# Altium PCB driverV1.1.PcbDoc (part 1 of 2)
Units mil, origin at the board's own origin, x right, y up, seen from the top; angles counter-clockwise.
Board outline 6000 x 4000 mil, 2 copper layers (Top Layer, Bottom Layer); 175 components, 117 nets, 501 pads, 586 vias.
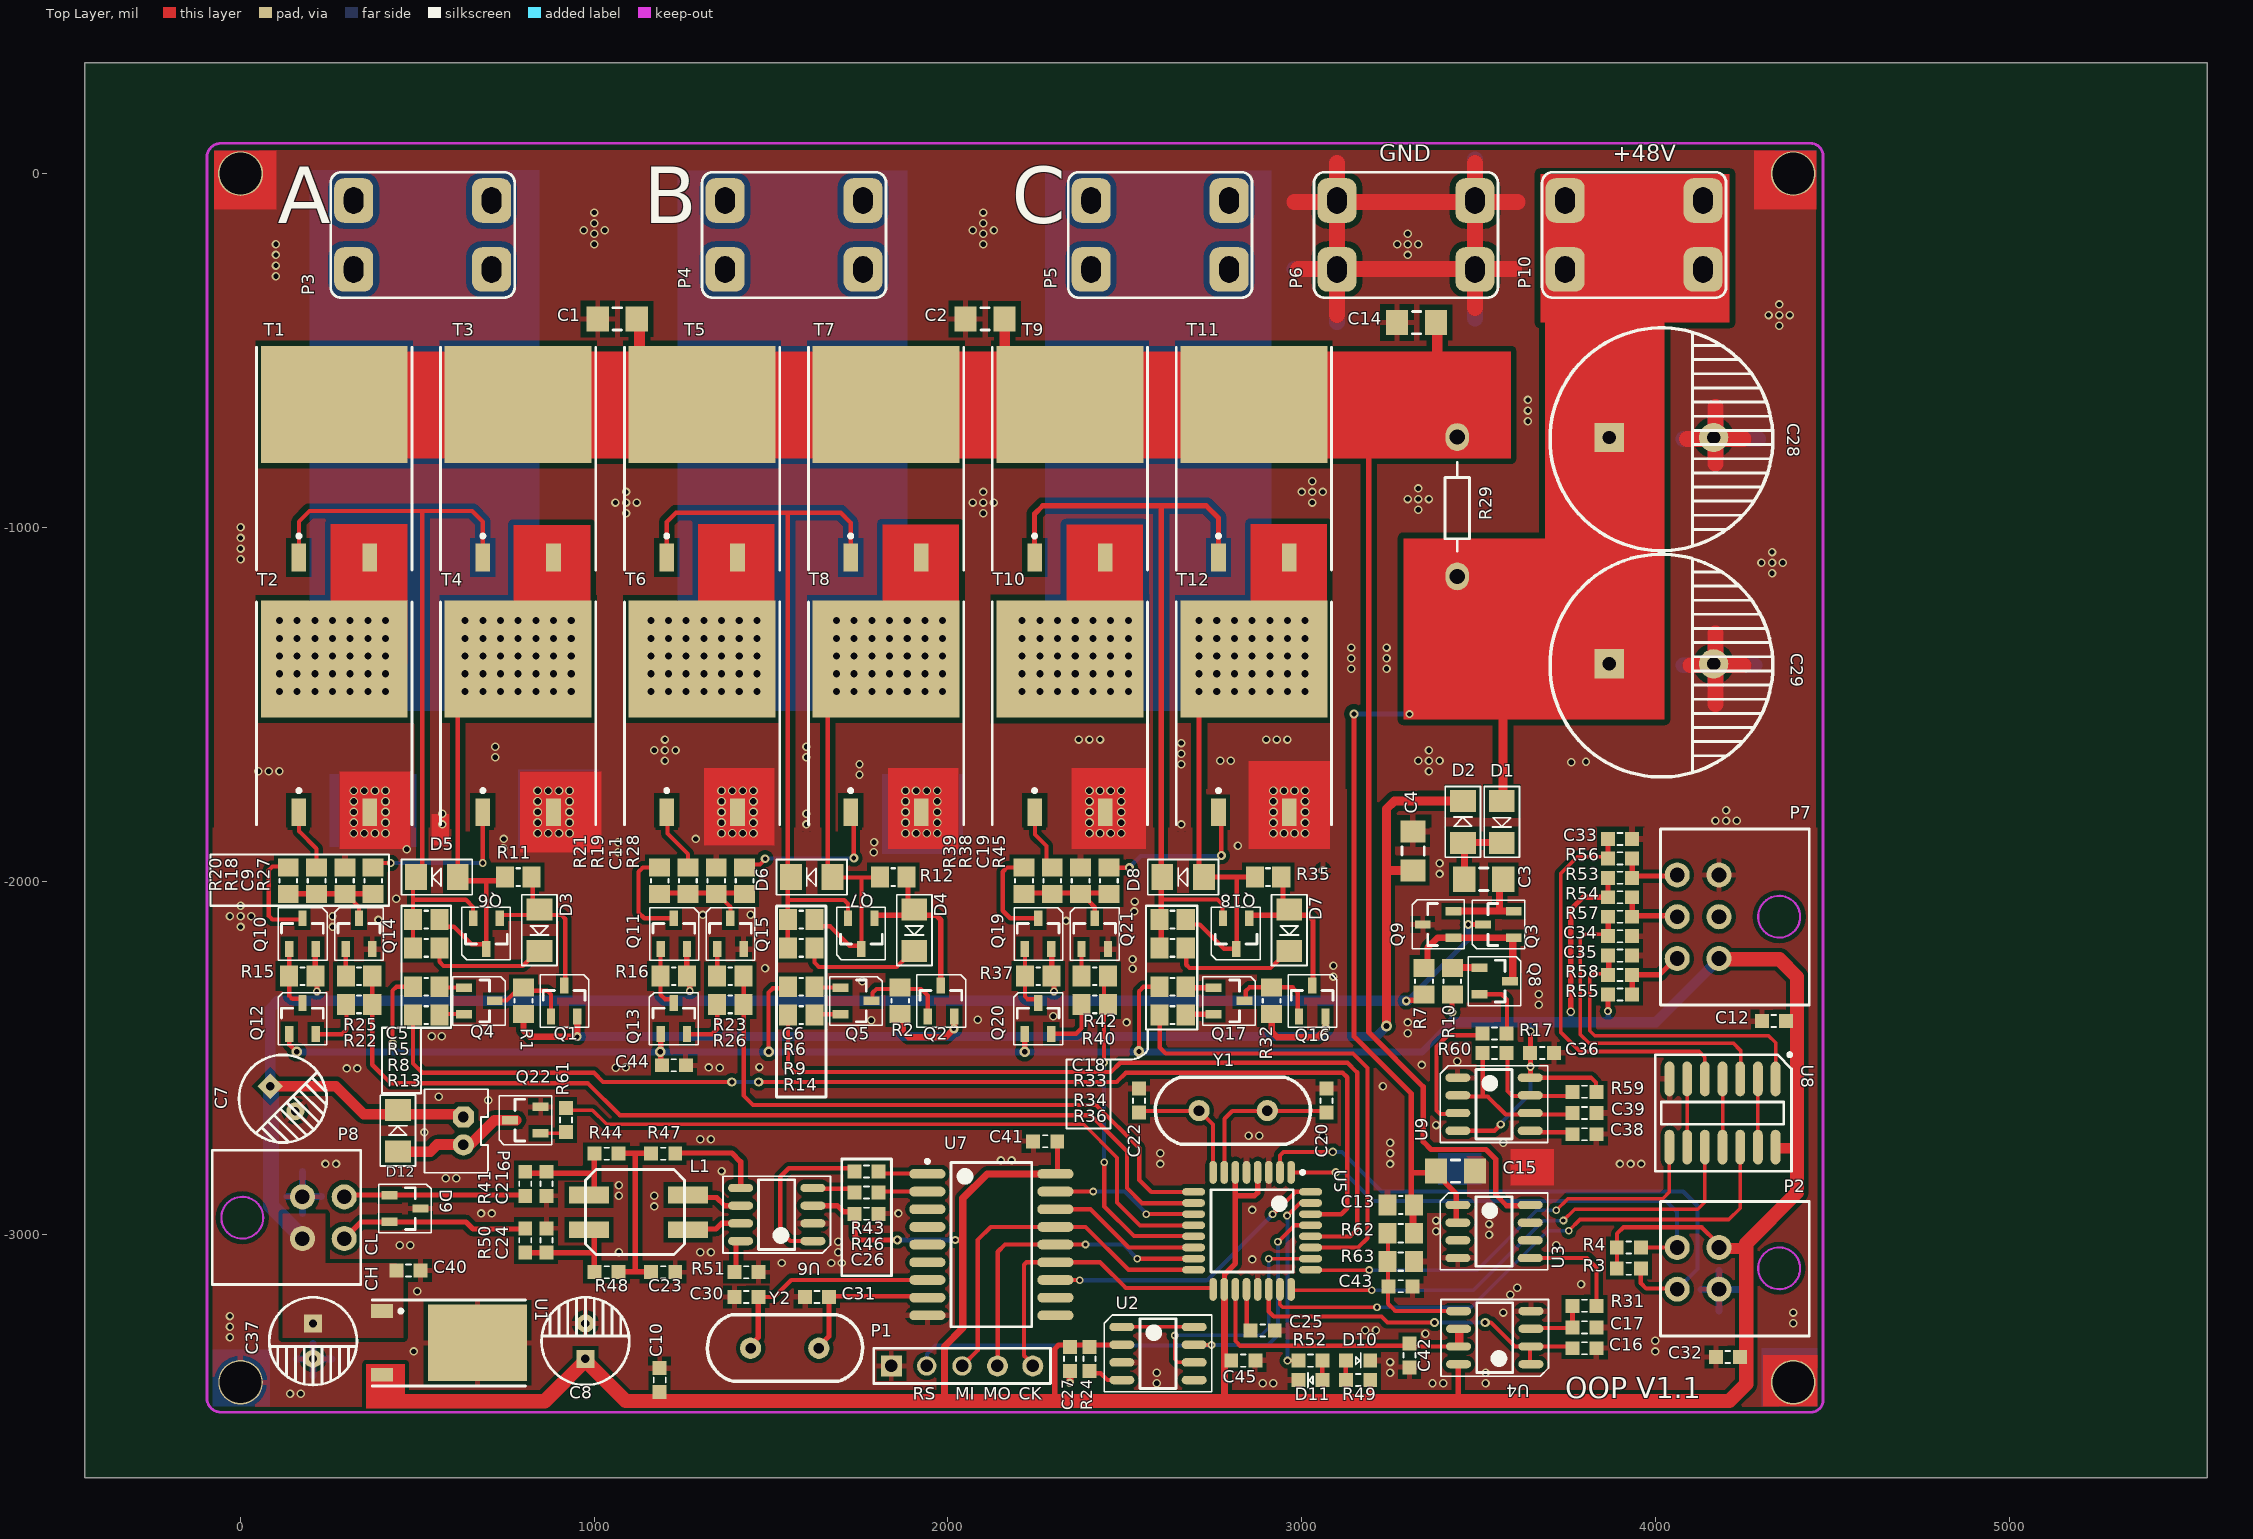
[diagram p0: Top Layer view]
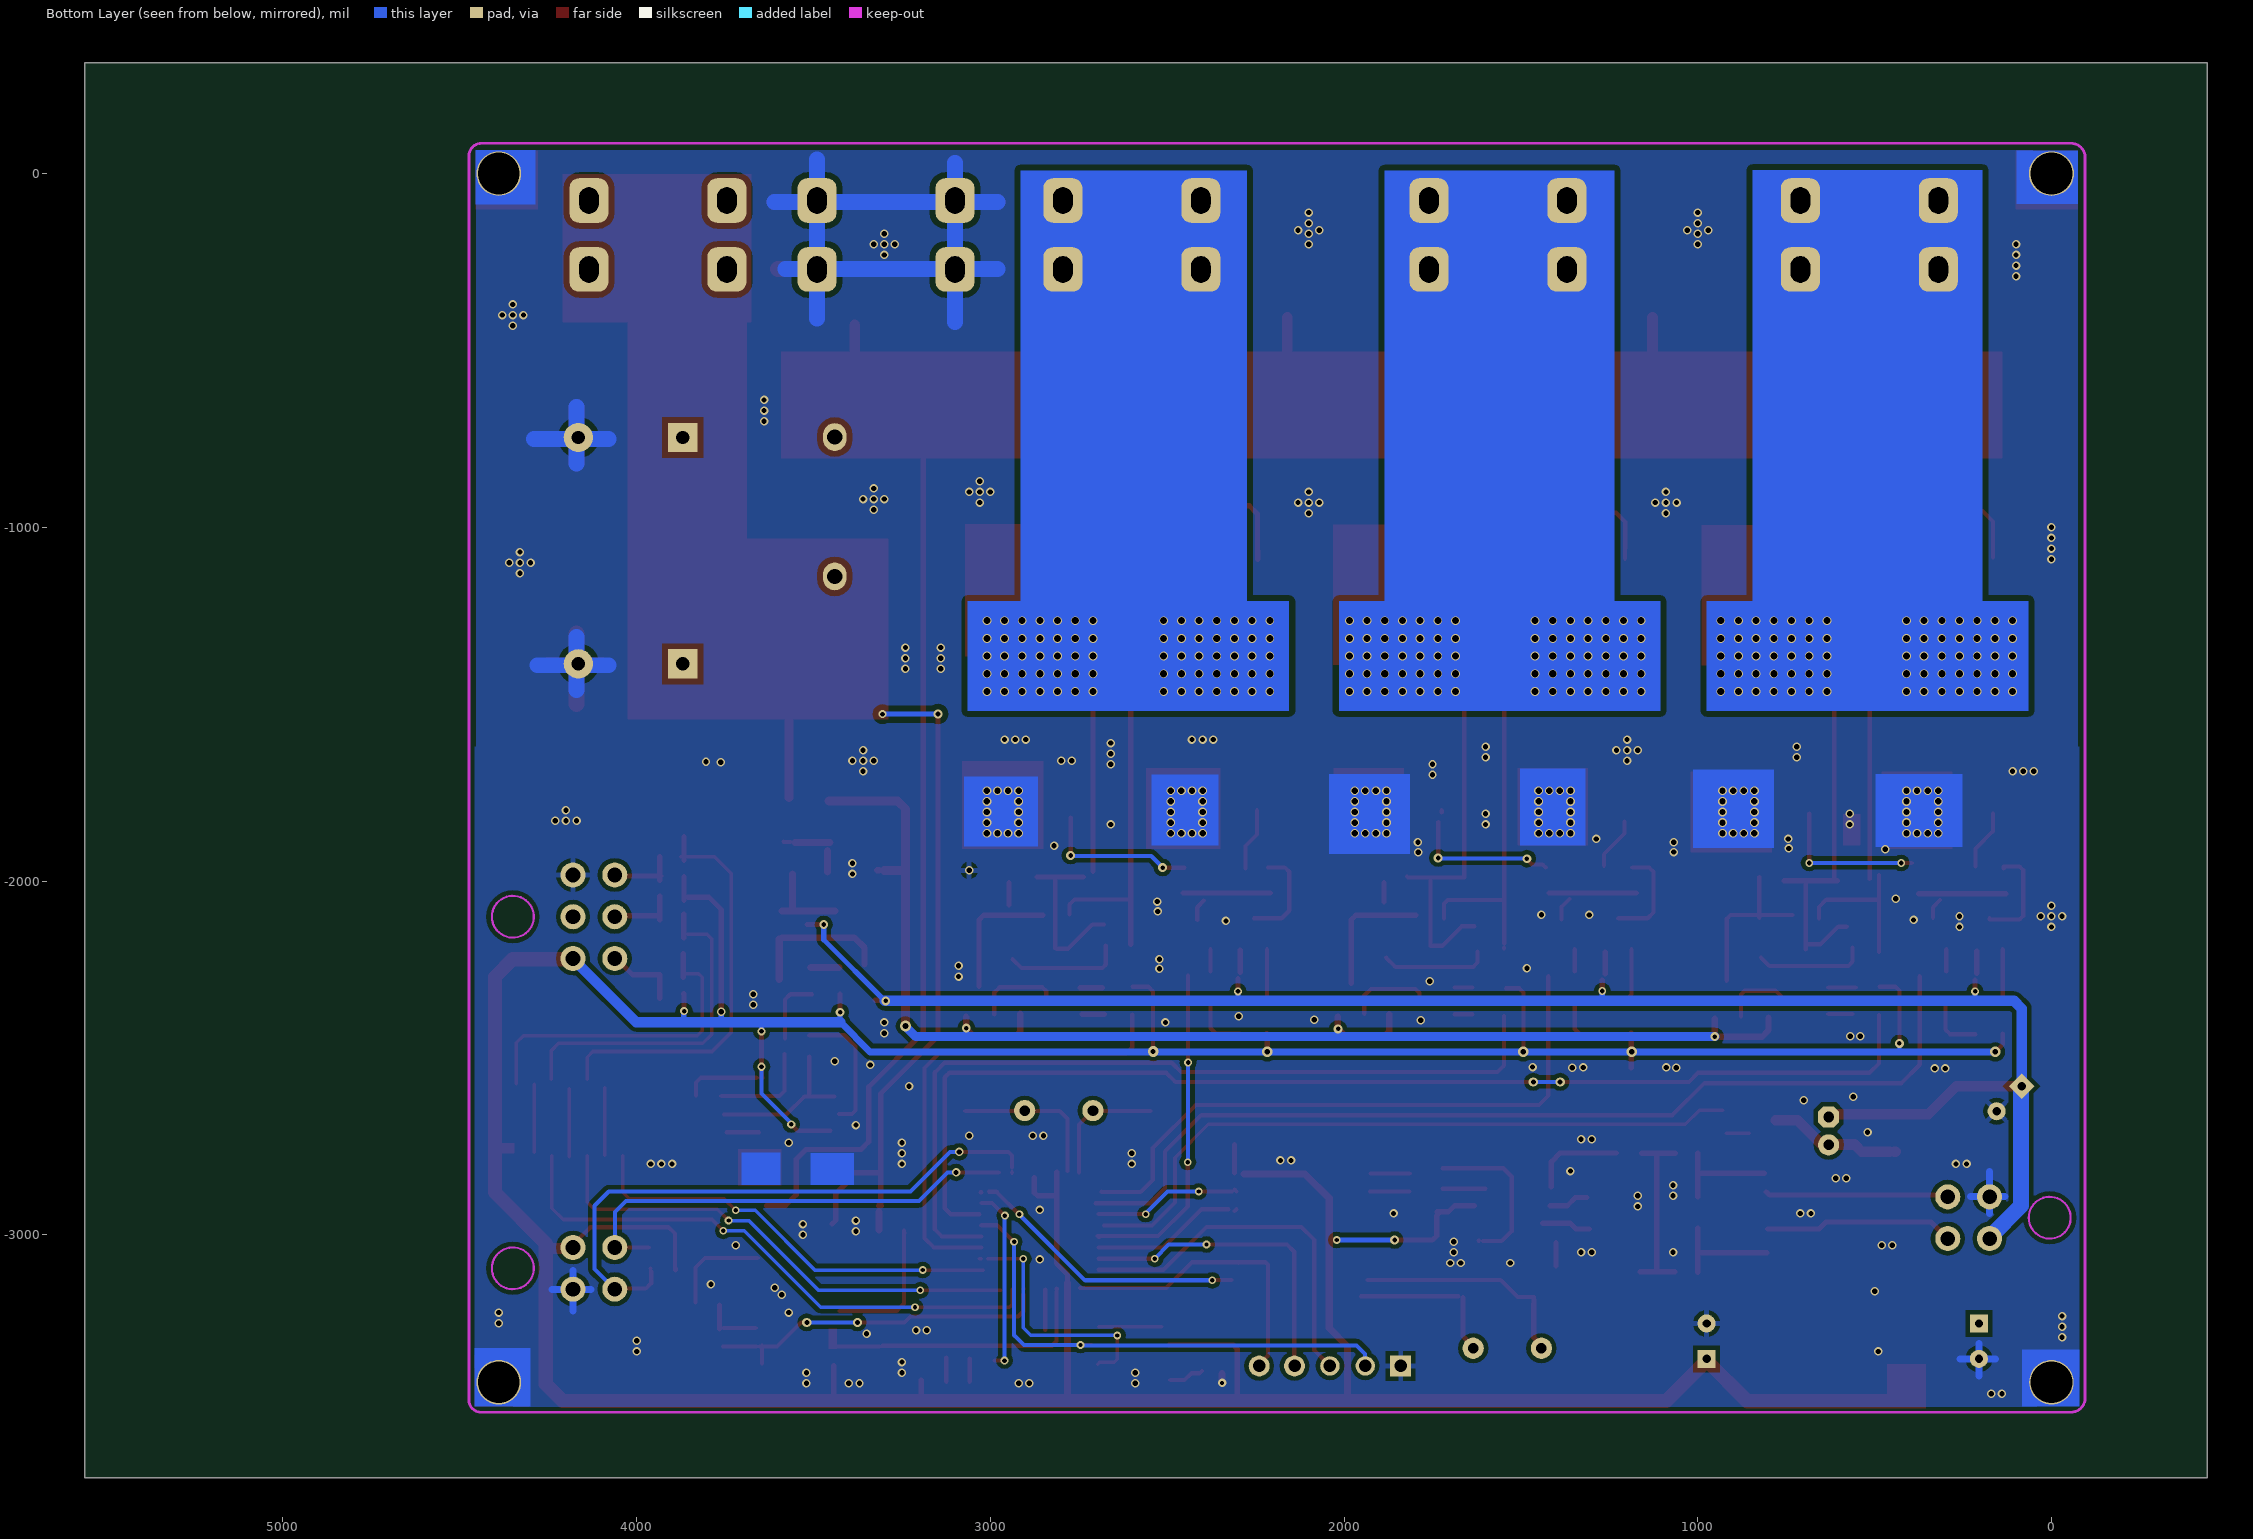
[diagram p1: Bottom Layer view, seen from below]

## Layer stack, top to bottom
Top Layer: signal copper 1.4
Dielectric: dielectric 12.6, FR-4, Dk 4.8
Bottom Layer: signal copper 1.4

## Board outline
-440,-3687 5560,-3687 5560,313 -440,313

## Design rules (kind name [scope] priority, off if disabled: settings)
Clearance [All] p1 off: gap=12
ComponentClearance [All] p1: gap=0 collisioncheckmode=3 verticalgap=0
HoleSize [All] p1: absolutevalues=TRUE maxlimit=200 minlimit=1 maxpercent=80.000 minpercent=20.000
PolygonConnect [All] p1: connectstyle=Relief reliefconductorwidth=15 reliefentries=4 polygonreliefangle="90 Angle"
RoutingVias [All] p1: holewidth=13 width=22 viastyle="Through Hole" minholewidth=10 minwidth=15 maxholewidth=200 maxwidth=250
SolderMaskExpansion [All] p1: expansion=4
TestPointUsage [All] p1: valid=0 allowmultiple=FALSE
Testpoint [All] p1: side=15 testpointundercomponent=TRUE minsize=40 maxsize=100 preferedsize=60 minholesize=0 maxholesize=40 preferedholesize=32 testpointgrid=1 style=1023 order=0-112345678
Width [All] p1: maxlimit=150 minlimit=10 preferedwidth=10 minimp=50.000000 maximp=50.000000 favimp=50.000000
17 further rules are at their usual default settings.

## Components (designator, comment, footprint, x,y, rotation, side; value= is the part's Value field where it differs from the comment)
C1 "Cap" 3216[1206] 1065,-411 r180 top
C2 "Cap" 3216[1206] 2105,-411 r180 top
C3 "Cap" 3216[1206] 3515,-1995 r0 top
C4 "Cap" 3216[1206] 3315,-1915 r90 top
C5 "Cap" R0805 525,-2109 r0 top
C6 "Cap" R0805 1585,-2109 r0 top
C7 "Cap Pol1" C6.3*12 155,-2651 r135 top
C8 "Cap Pol1" C6.3*12 975,-3251 r270 top
C9 "Cap" R0805 295,-1999 r270 top
C10 "Cap" 0603 1185,-3411 r270 top
C11 "Cap" R0805 1345,-1999 r270 top
C12 "Cap" 0603 4335,-2396 r0 top
C13 "Cap" R0805 3280,-2916 r0 top
C14 "Cap" 3216[1206] 3325,-421 r180 top
C15 "Cap" 3216[1206] 3435,-2820 r0 top
C16 "Cap" 0603 3800,-3321 r180 top
C17 "Cap" 0603 3800,-3262 r180 top
C18 "Cap" R0805 2635,-2109 r0 top
C19 "Cap" R0805 2375,-1999 r270 top
C20 "Cap" 0603 3070,-2621 r90 top
C21 "Cap" 0603 865,-2856 r90 top
C22 "Cap" 0603 2540,-2621 r90 top
C23 "Cap" 0603 1195,-3106 r180 top
C24 "Cap" 0603 865,-3016 r270 top
C25 "Cap" 0603 2890,-3271 r0 top
C26 "Cap" 0603 1770,-2941 r180 top
C27 "Cap" 0603 2345,-3351 r90 top
C28 "Cap Pol1" C16-7.5 4165,-1386 r180 top
C29 "Cap Pol1" C16-7.5 4165,-746 r180 top
C30 "Cap" 0603 1430,-3176 r180 top
C31 "Cap" 0603 1630,-3176 r180 top
C32 "Cap" 0603 4205,-3346 r180 top
C33 "Cap" 0603 3900,-1881 r180 top
C34 "Cap" 0603 3900,-2156 r180 top
C35 "Cap" 0603 3900,-2211 r180 top
C36 "Cap" 0603 3680,-2486 r0 top
C37 "Cap Pol1" C6.3*12 205,-3351 r90 top
C38 "Cap" 0603 3800,-2716 r0 top
C39 "Cap" 0603 3800,-2656 r0 top
C40 "Cap" 0603 475,-3101 r180 top
C41 "Cap" 0603 2275,-2736 r0 top
C42 "Cap" 0603 3305,-3341 r90 top
C43 "Cap" 0603 3280,-3146 r180 top
C44 "Cap" 0603 1225,-2521 r180 top
C45 "Cap" 0603 2835,-3356 r180 top
D1 "Diode" LL34 3566,-1833 r270 top
D2 "Diode" LL34 3456,-1833 r90 top
D3 "Diode" LL34 845,-2139 r270 top
D4 "Diode" LL34 1905,-2139 r270 top
D5 "Zener diode" LL34 555,-1989 r180 top
D6 "Zener diode" LL34 1615,-1989 r180 top
D7 "Diode" LL34 2965,-2139 r270 top
D8 "Zener diode" LL34 2665,-1989 r180 top
D9 "NUP2105L" SOT-23-NPN 465,-2926 r270 top
D10 "WORK" 0603-LED 3160,-3356 r0 top
D11 "FALT" 0603-LED 3025,-3411 r180 top
D12 "Diode" LL34 445,-2706 r90 top
L1 "B82793S0513N" B82793S0513N201 1265,-2986 r180 top
P1 "PROG" HDR1X5 1840,-3371 r0 top
P2 "ENC" 5557-4-SMALL 4180,-3036 r90 top
P3 "M5" M4 710,-76 r180 top
P4 "M5" M4 1760,-76 r180 top
P5 "M5" M4 2795,-76 r180 top
P6 "M5" M4 3490,-76 r180 top
P7 "HALL" 5557-6-small 4180,-2101 r90 top
P8 "CAN" 5557-4-SMALL 175,-3011 r270 top
P9 "FAN" PH2.0-2P 630,-2746 r270 top
P10 "M5" M4 4135,-76 r180 top
Q1 "PNP" SOT-23-PNP 915,-2339 r0 top
Q2 "PNP" SOT-23-PNP 1980,-2339 r0 top
Q3 "NPN" SOT-23-NPN 3556,-2123 r90 top
Q4 "NPN" SOT-23-NPN 675,-2339 r270 top
Q5 "NPN" SOT-23-NPN 1740,-2339 r270 top
Q6 "PNP" SOT-23-PNP 695,-2149 r180 top
Q7 "PNP" SOT-23-PNP 1755,-2149 r180 top
Q8 "NPN" SOT-23-NPN 3546,-2283 r270 top
Q9 "PNP" SOT-23-PNP 3386,-2123 r90 top
Q10 "PNP" SOT-23-PNP 175,-2149 r0 top
Q11 "PNP" SOT-23-PNP 1225,-2149 r0 top
Q12 "NPN" SOT-23-NPN 175,-2389 r0 top
Q13 "NPN" SOT-23-NPN 1225,-2389 r0 top
Q14 "NPN" SOT-23-NPN 335,-2149 r0 top
Q15 "NPN" SOT-23-NPN 1385,-2149 r0 top
Q16 "PNP" SOT-23-PNP 3030,-2339 r0 top
Q17 "NPN" SOT-23-NPN 2795,-2339 r270 top
Q18 "PNP" SOT-23-PNP 2815,-2149 r180 top
Q19 "PNP" SOT-23-PNP 2255,-2149 r0 top
Q20 "NPN" SOT-23-NPN 2255,-2389 r0 top
Q21 "NPN" SOT-23-NPN 2415,-2149 r0 top
Q22 "NPN" SOT-23-NPN 805,-2676 r90 top
R1 "Res1" R0805 800,-2339 r270 top
R2 "Res1" R0805 1865,-2339 r270 top
R3 "Res1" 0603 3925,-3096 r0 top
R4 "Res1" 0603 3925,-3036 r0 top
R5 "Res1" R0805 525,-2189 r180 top
R6 "Res1" R0805 1585,-2189 r180 top
R7 "Res1" R0805 3346,-2283 r270 top
R8 "Res1" R0805 525,-2299 r180 top
R9 "Res1" R0805 1585,-2299 r180 top
R10 "Res1" R0805 3426,-2283 r270 top
R11 "Res1" R0805 785,-1989 r0 top
R12 "Res1" R0805 1845,-1989 r0 top
R13 "Res1" R0805 525,-2379 r0 top
R14 "Res1" R0805 1585,-2379 r0 top
R15 "Res1" R0805 175,-2269 r180 top
R16 "Res1" R0805 1225,-2269 r180 top
R17 "Res1" 0603 3545,-2431 r0 top
R18 "Res1" R0805 215,-1999 r270 top
R19 "Res1" R0805 1265,-1999 r270 top
R20 "Res1" R0805 135,-1999 r270 top
R21 "Res1" R0805 1185,-1999 r270 top
R22 "Res1" R0805 335,-2349 r180 top
R23 "Res1" R0805 1385,-2349 r180 top
R24 "Res1" 0603 2400,-3351 r90 top
R25 "Res1" R0805 335,-2269 r0 top
R26 "Res1" R0805 1385,-2269 r0 top
R27 "Res1" R0805 375,-1999 r270 top
R28 "Res1" R0805 1425,-1999 r270 top
R29 "" 10-0.01R-1mm 3440,-745 r270 top
R31 "Res1" 0603 3800,-3201 r0 top
R32 "Res1" R0805 2915,-2339 r270 top
R33 "Res1" R0805 2635,-2189 r180 top
R34 "Res1" R0805 2635,-2299 r180 top
R35 "Res1" R0805 2905,-1989 r0 top
R36 "Res1" R0805 2635,-2379 r0 top
R37 "Res1" R0805 2255,-2269 r180 top
R38 "Res1" R0805 2295,-1999 r270 top
R39 "Res1" R0805 2215,-1999 r270 top
R40 "Res1" R0805 2415,-2349 r180 top
R41 "Res Semi" 0603 805,-2856 r90 top
R42 "Res1" R0805 2415,-2269 r0 top
R43 "Res Semi" 0603 1770,-2821 r0 top
R44 "Res Semi" 0603 1035,-2771 r0 top
R45 "Res1" R0805 2455,-1999 r270 top
R46 "Res Semi" 0603 1770,-2881 r180 top
R47 "Res Semi" 0603 1195,-2771 r180 top
R48 "Res Semi" 0603 1035,-3106 r0 top
R49 "Res1" 0603 3160,-3411 r0 top
R50 "Res Semi" 0603 805,-3016 r270 top
R51 "Res Semi" 0603 1430,-3106 r180 top
R52 "Res1" 0603 3025,-3356 r180 top
R53 "Res Semi" 0603 3900,-1991 r180 top
R54 "Res Semi" 0603 3900,-2046 r180 top
R55 "Res Semi" 0603 3900,-2321 r180 top
R56 "Res Semi" 0603 3900,-1936 r0 top
R57 "Res Semi" 0603 3900,-2101 r0 top
R58 "Res Semi" 0603 3900,-2266 r0 top
R59 "Res1" 0603 3800,-2596 r0 top
R60 "Res1" 0603 3545,-2486 r0 top
R61 "Res Semi" 0603 920,-2676 r90 top
R62 "Res1" 0805 3280,-2996 r0 top
R63 "Res1" 0805 3280,-3076 r0 top
T1 "CSD19536" D2PAK 265,-869 r0 top
T2 "CSD19536" D2PAK 265,-1589 r0 top
T3 "CSD19536" D2PAK 785,-869 r0 top
T4 "CSD19536" D2PAK 785,-1589 r0 top
T5 "CSD19536" D2PAK 1305,-869 r0 top
T6 "CSD19536" D2PAK 1305,-1589 r0 top
T7 "CSD19536" D2PAK 1825,-869 r0 top
T8 "CSD19536" D2PAK 1825,-1589 r0 top
T9 "CSD19536" D2PAK 2345,-869 r0 top
T10 "CSD19536" D2PAK 2345,-1589 r0 top
T11 "CSD19536" D2PAK 2865,-869 r0 top
T12 "CSD19536" D2PAK 2865,-1589 r0 top
U1 "L7805ACD2T-TR" TO-252 620,-3326 r270 top
U2 "MAX706RCSA" SOIC8 2595,-3336 r0 top
U3 "MAX4080T" SOIC8 3545,-2991 r0 top
U4 "LM358D" SOIC8 3545,-3291 r180 top
U5 "ATmega8-16AC" 32A_N 2860,-2989 r270 top
U6 "TJA1040" SOIC8 1515,-2943 r180 top
U7 "MCP2515" WSO18_M 2123,-3028 r0 top
U8 "MC74HC14AD" 751A 4190,-2656 r270 top
U9 "NE555D" SOIC8 3545,-2631 r0 top
Y1 "XTAL(7.3728M)" 49SD 2710,-2649 r0 top
Y2 "XTAL(16M)" 49SD 1635,-3321 r180 top

## Footprints (in the part's own frame and the unit in brackets; to place one, negate y for a bottom-side part, rotate by r counter-clockwise, add the part's x,y. Pads: shape width x height; smd on the part's side, far side on the other; paste and mask are expansions set on the pad)
10-0.01R-1mm [mm]
  oval 2x1.7 hole 1.08: 1(0,0) 2(10,0)
  silkscreen extent 1.8,-0.89 8.2,0.89
32A_N [mm] "32-Pin Thin Quad Flat Pack 0.8 mm Pitch, IPC Medium Density"
  oval 1.65x0.55 smd: 1(-4.2,2.8) 2(-4.2,2) 3(-4.2,1.2) 4(-4.2,0.4) 5(-4.2,-0.4) 6(-4.2,-1.2) 7(-4.2,-2) 8(-4.2,-2.8) 17(4.2,-2.8) 18(4.2,-2) 19(4.2,-1.2) 20(4.2,-0.4) 21(4.2,0.4) 22(4.2,1.2) 23(4.2,2) 24(4.2,2.8)
  oval 0.55x1.65 smd: 9(-2.8,-4.2) 10(-2,-4.2) 11(-1.2,-4.2) 12(-0.4,-4.2) 13(0.4,-4.2) 14(1.2,-4.2) 15(2,-4.2) 16(2.8,-4.2) 25(2.8,4.2) 26(2,4.2) 27(1.2,4.2) 28(0.4,4.2) 29(-0.4,4.2) 30(-1.2,4.2) 31(-2,4.2) 32(-2.8,4.2)
  silkscreen extent -4.32,-2.95 2.95,3.75, body extent -3.5,-3.5 3.5,3.5, height 1.2
49SD [mil]
  round 60 hole 30: 1(0,0) 2(193,0)
  silkscreen extent -124,-95 315,94
0603 [mm]
  rect 1x1 smd: 1(-0.864,0) 2(0.864,0)
  silkscreen extent -0.18,-0.43 0.18,0.43
0603-LED [mm]
  rect 1x1 smd: 1(-0.864,0) 2(0.864,0)
  silkscreen extent -0.18,-0.51 0.18,0.56
751A [mm]
  oval 2.5x0.7 smd: 1(-2.45,3.81) 2(-2.45,2.54) 3(-2.45,1.27) 4(-2.45,0) 5(-2.45,-1.27) 6(-2.45,-2.54) 7(-2.45,-3.81) 8(2.45,-3.81) 9(2.45,-2.54) 10(2.45,-1.27) 11(2.45,0) 12(2.45,1.27) 13(2.45,2.54) 14(2.45,3.81)
  silkscreen extent -4.31,-4.83 4.19,4.95, body extent -2,-4.38 2,4.38, height 1.75
0805 [mm]
  rect 1.3x1.5 smd: 1(-0.95,0) 2(0.95,0)
  silkscreen extent -0.15,-0.66 0.15,0.66
3216[1206] [mm] "Chip Resistor; Body 3.2 x 1.6 mm (LxW typ)"
  rect 1.6x1.8 smd: 1(-1.4,0) 2(1.4,0)
  silkscreen extent -0.3,-0.8 0.3,0.8
5557-4-SMALL [mm]
  round 1.8 hole 1.05: 1(0,0) 2(-3,0) 3(-3,3) 4(0,3)
  Keep-Out Layer circle w0.152: c-1.5,-4.32 r1.505
  silkscreen extent -6.35,-6.48 3.3,4.19
5557-6-small [mm]
  round 1.8 hole 1.05: 1(3,0) 2(0,0) 3(-3,0) 4(-3,3) 5(0,3) 6(3,3)
  Keep-Out Layer circle w0.152: c0,-4.32 r1.505
  silkscreen extent -6.35,-6.48 6.3,4.19
B82793S0513N201 [mm]
  rect 2.85x1.2 smd: 1(0,0) 2(0,-2.5) 3(7.112,-2.5) 4(7.112,0)
  silkscreen extent 0.25,-4.32 7.37,1.78
C6.3*12 [mm]
  rect 1.3x1.3 hole 0.6: 1(2.54,0)
  round 1.3 hole 0.6: 2(0,0)
  silkscreen extent -1.88,-3.15 4.42,3.15
C16-7.5 [mm]
  rect 2.1x2.1 hole 0.95: 1(7.5,0)
  round 2.1 hole 0.95: 2(0,0)
  silkscreen extent -4.25,-7.87 11.75,8.12
D2PAK [mm] "D2-PAK/TO-263-AB; 3 Leads (1 Cropped); Body 15.5 (inc. leads) x 10.5 mm (LxW max)"
  rect 1.05x2 smd: 1(-2.54,-5.5) 3(2.54,-5.5)
  rect 10.55x8.4 smd: 2(0,5.5)
  silkscreen extent -5.58,-6.4 5.58,9.6
HDR1X5 [mm] "Connector; Header; 5 Position"
  rect 1.5x1.5 hole 0.9: 1(0,0)
  round 1.397 hole 0.9: 2(2.54,0) 3(5.08,0)
  round 1.5 hole 0.9: 4(7.62,0) 5(10.16,0)
  silkscreen extent -1.27,-1.27 11.43,1.27
LL34 [mm] "MELF Diode, 2-Leads, Body 3.3x1.6mm, IPC Medium Density"
  rect 1.575x1.85 smd: 1(-1.5,0) 2(1.5,0)
  silkscreen extent -2.54,-1.27 2.54,1.27, body extent -1.65,-0.82 1.65,0.82, height 1.65
M4 [mm]
  rrect50% 2.8x3.2 hole 1.4 slot 1.9 at 90 deg: 1(0,4.953) 1(0,0) 1(9.906,0) 1(9.906,4.953)
  silkscreen extent -1.65,-2.03 11.56,6.99
PH2.0-2P [mil]
  oct 60x60 hole 30: 1(-78.74,0)
  round 60 hole 30: 2(0,0)
  silkscreen extent -157,-110 79,70
R0805 [mm] "Chip Resistor, 2-Leads, Body 2.0x1.3mm, IPC Medium Density"
  rect 1.298x1.501 smd: 1(-0.95,0) 2(0.95,0)
  silkscreen extent -0.13,-0.64 0.13,0.64
SOIC8 [mm]
  oval 1.8x0.6 smd: 1(-2.625,1.905) 2(-2.625,0.635) 3(-2.625,-0.635) 4(-2.625,-1.905) 5(2.575,-1.905) 6(2.575,-0.635) 7(2.575,0.635) 8(2.575,1.905)
  silkscreen extent -3.89,-2.74 3.84,2.77, body extent -2.03,-2.5 1.97,2.5, height 1.76
SOT-23-NPN [mm]
  rect 0.6x1.143 smd: 1(0.95,-1.108) 2(-0.95,-1.108) 3(0,1.108)
  silkscreen extent -1.75,-1.89 1.75,1.87, body extent -1.5,-0.66 1.5,0.74, height 1.1
SOT-23-PNP [mm]
  rect 0.6x1.143 smd: 1(0.95,-1.108) 2(-0.95,-1.108) 3(0,1.108)
  silkscreen extent -1.73,-1.89 1.78,1.87, body extent -1.5,-0.66 1.5,0.74, height 1.1
TO-252 [mm]
  rect 1x1.6 smd: 1(-2.793,-5.584) 3(1.777,-5.584)
  rect 5.5x7.1 smd: 4(-0.508,1.266)
  silkscreen extent -3.59,-6.28 2.58,4.72
WSO18_M [mm] "SOIC, 18-Leads, Body 11.6x7.5mm, Pitch 1.27mm, IPC Low Density"
  oval 2.6x0.7 smd: 1(-4.6,5.08) 2(-4.6,3.81) 3(-4.6,2.54) 4(-4.6,1.27) 5(-4.6,0) 6(-4.6,-1.27) 7(-4.6,-2.54) 8(-4.6,-3.81) 9(-4.6,-5.08) 10(4.6,-5.08) 11(4.6,-3.81) 12(4.6,-2.54) 13(4.6,-1.27) 14(4.6,0) 15(4.6,1.27) 16(4.6,2.54) 17(4.6,3.81) 18(4.6,5.08)
  silkscreen extent -4.72,-5.9 2.9,6.1, body extent -3.8,-5.95 3.8,5.95, height 2.65

## Part data
C1 C2 C3 C4 C5 C6 C9 C10 C11 C12 C13 C14 C15 C16 C17 C18 C19 C20 C21 C22 C23 C24 C25 C26 C27 C30 C31 C32 C33 C34 C35 C36 C38 C39 C40 C41 C42 C43 C44 C45: "Capacitor"
C7 C8 C28 C29 C37: "Polarized Capacitor (Radial)"
D1 D2 D3 D4 D7 D12: library part "Diode 1N5408", "3 Amp Medium Power Silicon Rectifier Diode"
D5 D6 D8: library part "D Zener", "Zener Diode"
D10 D11: library part LED2, "Typical RED, GREEN, YELLOW, AMBER GaAs LED"
L1: library part B82793S0513N201
P1 P7: library part "Header 5", "Header, 5-Pin"
P2 P8: library part "Header 4", "Header, 4-Pin"
P6 P9: library part "Header 2", "Header, 2-Pin"
Q1 Q2 Q6 Q7 Q9 Q10 Q11 Q16 Q18 Q19: library part 2N5401, "PNP General Purpose Amplifier"
Q3 Q4 Q5 Q8 Q12 Q13 Q14 Q15 Q17 Q20 Q21 Q22: library part 2N5551, "NPN General Purpose Amplifier"
R1 R2 R3 R4 R5 R6 R7 R8 R9 R10 R11 R12 R13 R14 R15 R16 R17 R18 R19 R20 R21 R22 R23 R24 R25 R26 R27 R28 R31 R32 R33 R34 R35 R36 R37 R38 R39 R40 R42 R45 R49 R52 R59 R60 R62 R63: "Resistor"
R29: library part Res1, "Resistor"
R41 R43 R44 R46 R47 R48 R50 R51 R53 R54 R55 R56 R57 R58 R61: "Semiconductor Resistor"
T1 T2 T3 T4 T5 T6 T7 T8 T9 T10 T11 T12: library part IRF644S, "HEXFET N-Channel Power MOSFET"
U1: library part MC78M05ACDTRK, "Three-Terminal Medium Current Positive Voltage Regulator"
U2: "+3V Voltage Monitoring, Low-Cost, µP Supervisory Circuit"
U3: library part MAX4080
U4: "Dual Low-Power Operational Amplifier"
U5: "8-Bit AVR Microcontroller with 8K Bytes of In-System Programmable Flash Memory"
U8: "Hex Schmitt-Trigger Inverter"
U9: "Precision Timer"
Y1 Y2: library part XTAL, "Crystal Oscillator"

## Free pads (board coordinates)
  round 125.98 hole 118.11: 0(0,-3417.32) 1(4389.76,-3417.32) 2(4389.76,0)
  oval 127.17x125.98 hole 118.11: 3(0,0)

## Via types
v1: diameter 24, hole 15, Top Layer to Bottom Layer, 237 vias
v2: diameter 25, hole 20, Top Layer to Bottom Layer, 210 vias
v3: diameter 25, hole 18, Top Layer to Bottom Layer, 84 vias
v4: diameter 22, hole 12, Top Layer to Bottom Layer, 14 vias
v5: diameter 22, hole 13, Top Layer to Bottom Layer, 12 vias
v6: diameter 25, hole 13, Top Layer to Bottom Layer, 12 vias
v7: diameter 30, hole 15, Top Layer to Bottom Layer, 5 vias
v8: diameter 23, hole 13, Top Layer to Bottom Layer, 5 vias
v9: diameter 26, hole 14, Top Layer to Bottom Layer, 4 vias
v10: diameter 25, hole 15, Top Layer to Bottom Layer, 1 vias
v11: diameter 30, hole 17, Top Layer to Bottom Layer, 1 vias
v12: diameter 24, hole 12, Top Layer to Bottom Layer, 1 vias

## Nets (pads, with @x,y where several pads share a name; then routed paths per layer and width w, separated by ;. In a path a pad name is that pad's centre, name@x,y a point inside that pad or via, vN(x,y) a via of type N, cw(c..) or ccw(c..) an arc to the next point about the centre after c; other vN are vias at no path point)
+5V: C8.1 C10.2 C12.2 C26.2 C27.2 C32.1 C36.1 C41.2 C44.2 C45.2 P2.1 P7.3 Q12.2 Q13.2 Q20.2 R3.1 R4.1 R8.2 R9.2 R10.2 R24.2 R34.2 R49.2 R53.2 R54.2 R55.2 R59.2 U1.3 U2.2 U4.8 U5.4 U5.6 U5.18 U6.3 U7.18 U8.14 U9.4 U9.8 | length 14885
  Top Layer w12: Q12.2@137.99,-2432.64 Q12.2@138,-2432 ; Q12.2@138,-2431 138,-2463 158,-2483 v7@158,-2489 ; v6@430,-2462 430,-2310 441,-2299 R8.2@486,-2299 ; v7(1493,-2483) 1493,-2315 1505,-2303 R9.2@1542,-2303 ; v7(2540,-2482) 2540,-2312 2553,-2299 R34.2@2597.6,-2299 ; U9.4@3453,-2706 3545,-2706 v8(3563,-2688) ; U9.8@3662,-2556 3818,-2556 3832,-2570 R59.2@3832,-2606 ; R3.1@3892,-3091 3892,-2997 3910,-2979 4131,-2979 P2.1@4173,-3021
  Top Layer w15: C44.2@1188,-2528 Q13.2@1188,-2430 ; U6.3@1631,-2918 1688,-2918 1705,-2935 C26.2@1737,-2935 ; C26.2@1734.01,-2941.16 C26.2@1734,-2941 ; C26.2@1738,-2946 1738,-3003 1750,-3015 v6@1856,-3015 ; v7@2217.6,-2483.6 Q20.2@2217.6,-2436 ; Q20.2@2218.92,-2432.7 Q20.2@2219,-2431 ; 2302,-3455 2302,-3323 2313,-3312 U2.2@2494,-3312 ; U7.18@2310,-2825 C41.2@2310,-2746 ; U5.18@2782,-3136 2782,-3112 2812.76,-3081.24 U5.6@2812.76,-2823.65 ; 2817.26,-2890 2867,-2890 2876,-2881 U5.4@2876,-2839 ; 3195,-3470 R49.2@3195,-3411 ; v6(3425,-2371) R10.2@3425,-2320.4 ; 3443,-3462 U4.8@3443,-3370 ; U9.8@3646.36,-2556 U9.8@3648,-2556 ; U9.8@3647,-2557 v8(3647,-2425) ; v1@3761,-2369 3761,-2081 3796,-2046 R54.2@3855,-2046 ; v8@3866,-2367 R55.2@3866,-2325 ; R54.2@3866,-2055 R53.2@3866,-1988 ; R55.2@3866.92,-2321.03 R55.2@3867,-2319 ; R3.1@3890,-3100 R3.1@3890.14,-3095.97
  Top Layer w20: 1990,-3461 1990,-3316 2042,-3264 2042,-2897 2111,-2828 U7.18@2283,-2828 ; 2782,-3463 U5.18@2782,-3136
  Top Layer w30: C8.1@972,-3348 C8.1@973,-3348 ; P2.1@4181,-3039 4240,-3039
  Top Layer w40: 395,-3471 860,-3471 C8.1@975,-3356 ; C8.1@972.5,-3353.5 1089,-3470 4209,-3470 4257,-3422 4257,-3025 4401,-2881 4401,-2271 4351,-2221 P7.3@4181,-2221
  Bottom Layer w12: 430,-2481 v6@430,-2464.74 ; v8@3562,-2688 3562,-2686 3647,-2601 v8(3647,-2525)
  Bottom Layer w15: v6@1858,-3015 v4(2021,-3015) ; 3425,-2401 v6(3425,-2371) ; v8@3647,-2426 3647,-2396 ; 3761,-2401 v1@3761,-2371 ; 3867,-2397 v8@3867,-2367
  Bottom Layer w20: v7@158,-2483 3340,-2483 3424,-2399
  Bottom Layer w30: 3424,-2399 4001,-2399 P7.3@4175,-2225
  Bottom Layer w40: P7.3@4175,-2225 P7.3@4175,-2223
  other v1: 3761,-2370
  other v6: 1857,-3015 430,-2459
  other v7: 159,-2483 1187,-2483 2217,-2483
  other v8: 3866,-2368
+12V: C7.1 C37.1 C40.2 D12.2 P8.1 P9.1 Q3.3 Q10.1 Q11.1 Q19.1 R7.2 R15.1 R16.1 R37.1 U1.1 | length 5230
  Top Layer w15: R15.1@211.6,-2261.04 Q10.1@211.6,-2198.64 ; v5@216,-2313 R15.1@216,-2281 ; R16.1@1261.6,-2263.04 Q11.1@1261.6,-2200.64 ; v5(1270,-2311) R16.1@1270,-2280 ; R37.1@2293.4,-2258.36 Q19.1@2293.4,-2195.96 ; v5(2300,-2312) R37.1@2300,-2276.6 ; v6@3294,-2337 R7.2@3326,-2337 ; v6(3471,-2123) Q3.3@3518,-2123
  Top Layer w30: C7.1@91,-2580 269,-2580 348,-2659 P9.1@635,-2659
  Bottom Layer w15: 216,-2342 v5(216,-2312) ; 1270,-2341 v5(1270,-2311) ; 2300,-2342 v5(2300,-2312) ; v6@3298,-2339 3471,-2166 v6(3471,-2123)
  Bottom Layer w30: C7.1@84,-2579 84,-2361 106,-2339 v6@3298,-2339
  Bottom Layer w45: C7.1@86,-2579 86,-2918 175,-3007 P8.1@175,-3012
  other v6: 3296,-2339
A: C5.2 D5.1 P3.1 Q6.3 R11.1 T1.3 T2.2 T3.3 T4.2 | length 992.9
  Top Layer w12: C5.2@579,-2129 603,-2129 653,-2179 Q6.3@694,-2179 ; D5.1@614.06,-1999 T4.2@614.06,-1485.06 ; Q6.3@695,-2192.64 695,-1999
  Top Layer w15: D5.1@606.06,-1999 R11.1@755.69,-1999
  other v2: 110,-1464 160,-1464 210,-1464 260,-1464 310,-1464 360,-1464 410,-1464 635,-1464 685,-1464 735,-1464 785,-1464 835,-1464 885,-1464 935,-1464 110,-1414 160,-1414 210,-1414 260,-1414 310,-1414 360,-1414 410,-1414 635,-1414 685,-1414 735,-1414 785,-1414 835,-1414 885,-1414 935,-1414 110,-1364 160,-1364 210,-1364 260,-1364 310,-1364 360,-1364 410,-1364 635,-1364 685,-1364 735,-1364 785,-1364 835,-1364 885,-1364 935,-1364 110,-1314 160,-1314 210,-1314 260,-1314 310,-1314 360,-1314 410,-1314 635,-1314 685,-1314 735,-1314 785,-1314 835,-1314 885,-1314 935,-1314 110,-1264 160,-1264 210,-1264 260,-1264 310,-1264 360,-1264 410,-1264 635,-1264 685,-1264 735,-1264 785,-1264 835,-1264 885,-1264 935,-1264
B: C6.2 D6.1 P4.1 Q7.3 R12.1 T5.3 T6.2 T7.3 T8.2 | length 979
  Top Layer w12: C6.2@1631,-2128 1667,-2128 1722,-2183 Q7.3@1755,-2183 ; T8.2@1660,-1513 1660,-1990 1819,-1990 R12.1@1822,-1987 ; Q7.3@1756,-2184 1756,-1992
  other v2: 1160,-1464 1210,-1464 1260,-1464 1310,-1464 1360,-1464 1410,-1464 1460,-1464 1685,-1464 1735,-1464 1785,-1464 1835,-1464 1885,-1464 1935,-1464 1985,-1464 1160,-1414 1210,-1414 1260,-1414 1310,-1414 1360,-1414 1410,-1414 1460,-1414 1685,-1414 1735,-1414 1785,-1414 1835,-1414 1885,-1414 1935,-1414 1985,-1414 1160,-1364 1210,-1364 1260,-1364 1310,-1364 1360,-1364 1410,-1364 1460,-1364 1685,-1364 1735,-1364 1785,-1364 1835,-1364 1885,-1364 1935,-1364 1985,-1364 1160,-1314 1210,-1314 1260,-1314 1310,-1314 1360,-1314 1410,-1314 1460,-1314 1685,-1314 1735,-1314 1785,-1314 1835,-1314 1885,-1314 1935,-1314 1985,-1314 1160,-1264 1210,-1264 1260,-1264 1310,-1264 1360,-1264 1410,-1264 1460,-1264 1685,-1264 1735,-1264 1785,-1264 1835,-1264 1885,-1264 1935,-1264 1985,-1264
BT_PWM: R17.1 U9.3 | length 376.4
  Top Layer w12: U9.3@3428,-2659 3391,-2659 3381,-2649 3381,-2468 3413,-2436 R17.1@3512,-2436
C: C18.2 D8.1 P5.1 Q18.3 R35.1 T9.3 T10.2 T11.3 T12.2 | length 957.8
  Top Layer w12: C18.2@2679,-2123 2712,-2123 2780.4,-2191.4 Q18.3@2812.04,-2191.4 ; Q18.3@2816.4,-2190.36 2816.4,-1990
  Top Layer w15: D8.1@2710,-1972 T12.2@2710,-1507 ; D8.1@2736.96,-1988.6 R35.1@2868,-1988.6
  other v2: 2210,-1464 2260,-1464 2310,-1464 2360,-1464 2410,-1464 2460,-1464 2510,-1464 2710,-1464 2760,-1464 2810,-1464 2860,-1464 2910,-1464 2960,-1464 3010,-1464 2210,-1414 2260,-1414 2310,-1414 2360,-1414 2410,-1414 2460,-1414 2510,-1414 2710,-1414 2760,-1414 2810,-1414 2860,-1414 2910,-1414 2960,-1414 3010,-1414 2210,-1364 2260,-1364 2310,-1364 2360,-1364 2410,-1364 2460,-1364 2510,-1364 2710,-1364 2760,-1364 2810,-1364 2860,-1364 2910,-1364 2960,-1364 3010,-1364 2210,-1314 2260,-1314 2310,-1314 2360,-1314 2410,-1314 2460,-1314 2510,-1314 2710,-1314 2760,-1314 2810,-1314 2860,-1314 2910,-1314 2960,-1314 3010,-1314 2210,-1264 2260,-1264 2310,-1264 2360,-1264 2410,-1264 2460,-1264 2510,-1264 2710,-1264 2760,-1264 2810,-1264 2860,-1264 2910,-1264 2960,-1264 3010,-1264
CAN_INT: U5.32 U7.12 | length 788.4
  Top Layer w12: U7.12@2319,-3128 v5@2373,-3128 ; v5@2919,-2942 2982.24,-2878.76 U5.32@3004,-2878.76 ; U5.32@3025.32,-2879.95 U5.32@3027,-2880
  Bottom Layer w12: v5(2373,-3129) 2732,-3129 2915.5,-2945.5 v5@2918.5,-2945.5
  other v5: 2918,-2942
CAN_RST: U5.11 U7.17 | length 411.2
  Top Layer w12: U7.17@2304.1,-2878 U7.17@2309.1,-2873 ; U7.17@2317,-2878 v4@2410,-2878 ; v4@2561,-2941.76 U5.11@2694.65,-2941.76
  Bottom Layer w12: v4(2411,-2878) 2499,-2878 2561,-2940 v4@2561,-2941.76
  other v4: 2561,-2942
CANH: D9.1 P8.4 R50.1 | length 537.6
  Top Layer w15: P8.4@293.11,-3011 340.11,-2964 637,-2964 657,-2984 R50.1@803,-2984
CANL: D9.2 P8.3 R41.1 | length 512.7
  Top Layer w15: P8.3@297,-2888 797,-2888 R41.1@806,-2879
CS: U5.14 U7.16 | length 419.6
  Top Layer w12: U7.16@2304.1,-2928 U7.16@2309.1,-2933 ; U7.16@2327,-2928 2403,-2928 2511.24,-3036.24 U5.14@2694.65,-3036.24
CSA: C16.2 U4.1 U4.2 U5.22 | length 975.4
  Top Layer w12: U5.22@2906,-3152 U5.22@2906.07,-3154.39 ; U5.22@2907,-3168 2907,-3217 2921,-3231 3226,-3231 3243,-3248 v9(3376,-3248) ; v9@3521,-3248 3535,-3248 3603,-3316 U4.2@3648.36,-3316 U4.2@3653,-3316 ; U4.1@3646,-3364 U4.2@3646,-3314 ; U4.2@3662,-3316 C16.2@3756,-3316
  Bottom Layer w12: v9@3381,-3248 v9(3519,-3248)
FALT: R52.2 U5.31 | length 516.2
  Top Layer w12: v5@2960,-2946 2995.74,-2910.26 U5.31@3025.35,-2910.26 ; v5@2962,-3356 R52.2@2988,-3356
  Bottom Layer w12: v5(2960,-3356) v5@2960,-2946
  other v5: 2959,-2946
FAN: R61.2 U5.12 | length 1958.4
  Top Layer w10: R61.2@930,-2648 995,-2648 1035,-2688 2384,-2688 2478,-2782 2478,-2909 2543,-2974 U5.12@2679,-2974